# Altium PCB handwriting_PCB1.PcbDoc
Units mil, origin at the board's own origin, x right, y up, seen from the top; angles counter-clockwise.
Board outline 2890 x 3915 mil, 2 copper layers (Top Layer, Bottom Layer); 66 components, 63 nets, 308 pads, 795 vias.
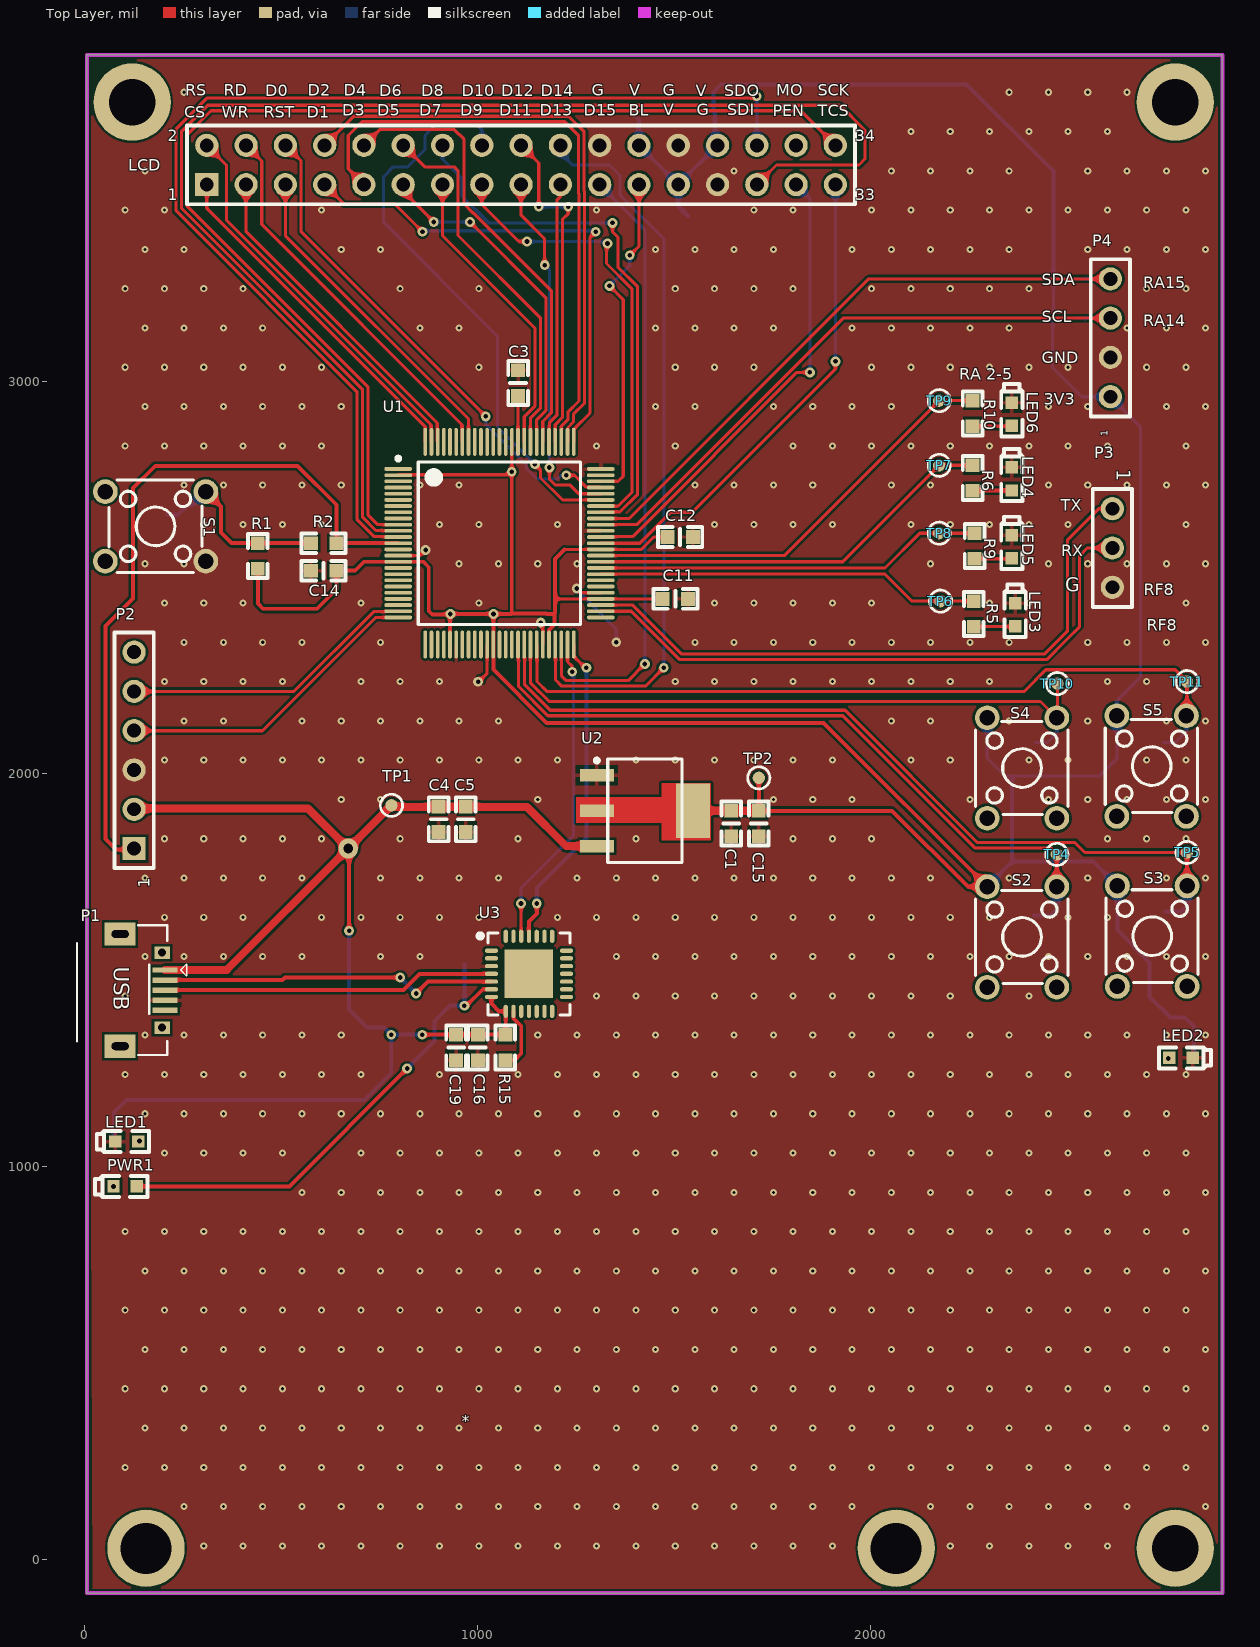
[diagram p0: Top Layer view]
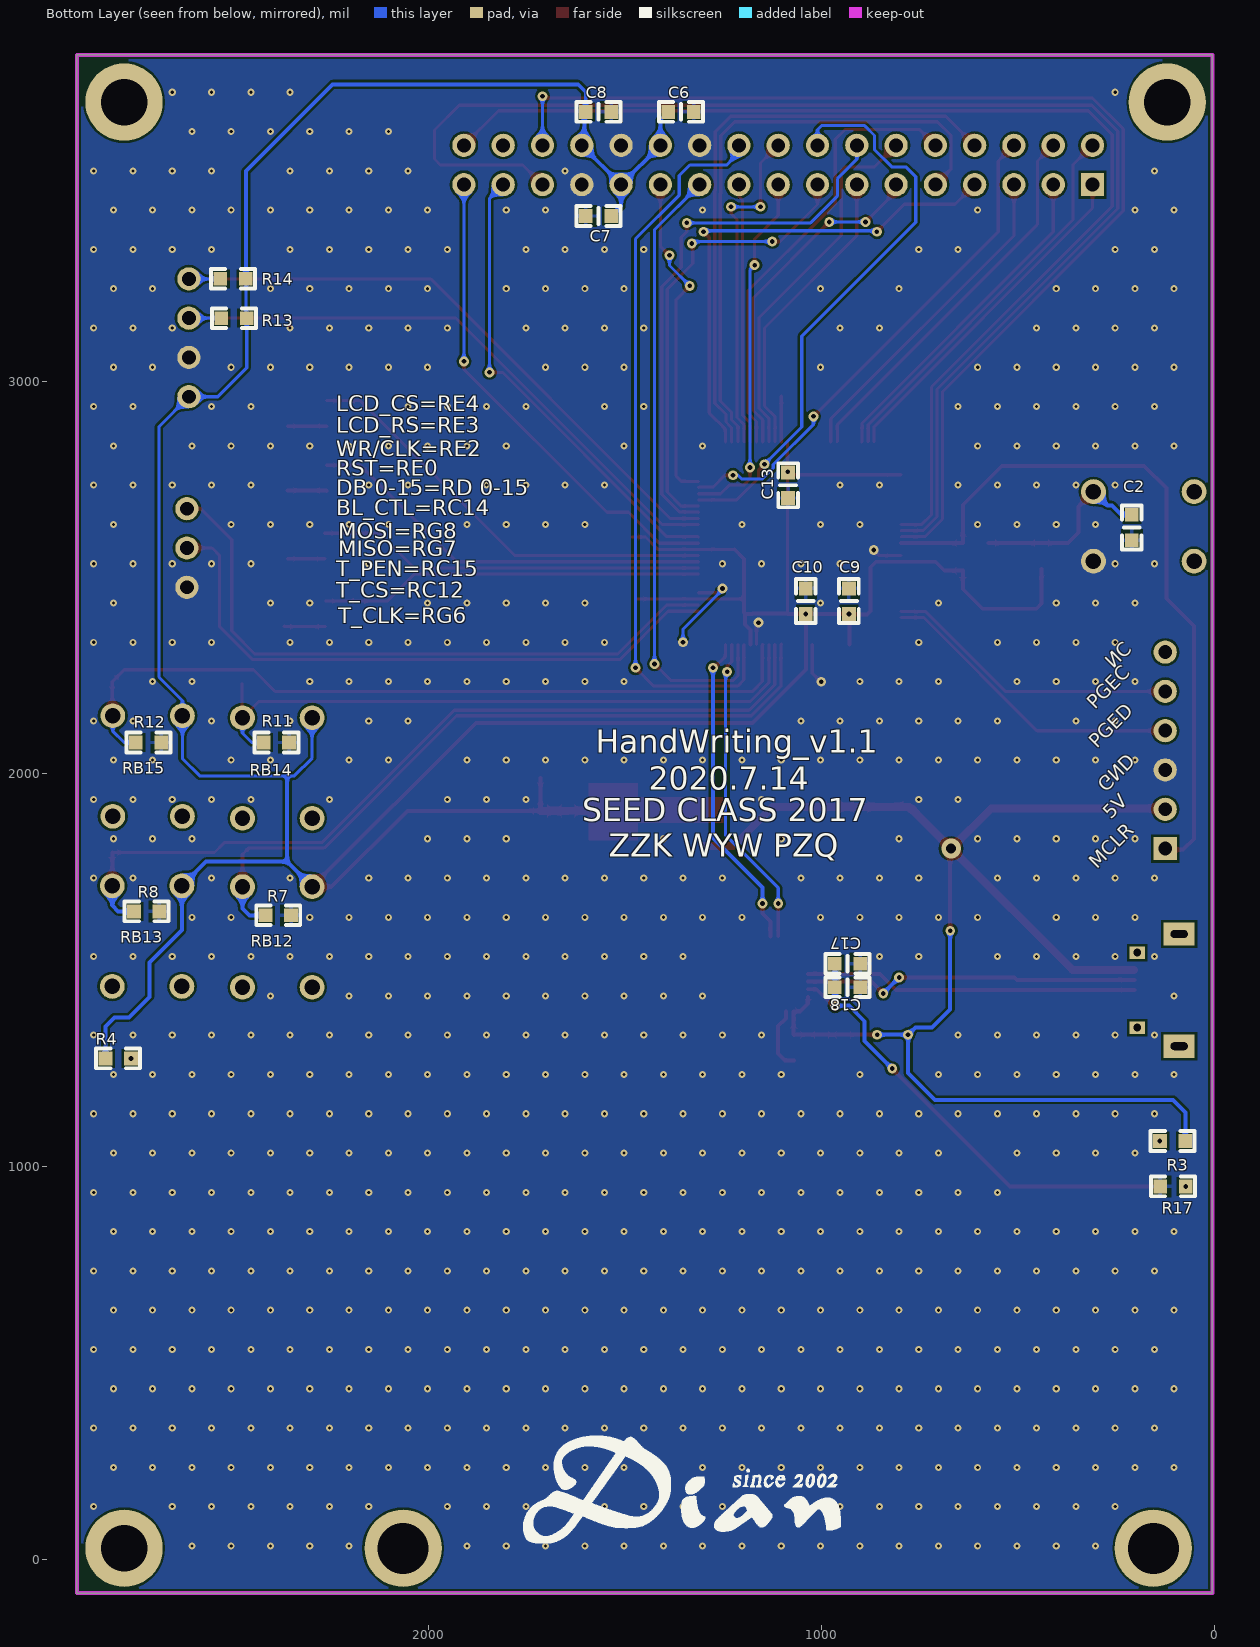
[diagram p1: Bottom Layer view, seen from below]

## Layer stack, top to bottom
Top Solder: solder mask 0.4, Solder Resist, Dk 3.5
Top Layer: signal copper 1.4
Dielectric 1: dielectric 12.6, FR-4, Dk 4.8
Bottom Layer: signal copper 1.4
Bottom Solder: solder mask 0.4, Solder Resist, Dk 3.5

## Board outline
5,-85 2895,-85 2895,3695 2895,3830 5,3830

## Design rules (kind name [scope] priority, off if disabled: settings)
Clearance [All] p1: gap=6 ignorepadtopadclearanceinfootprint=FALSE
HoleSize [All] p1: absolutevalues=TRUE maxlimit=1000 minlimit=1 maxpercent=80.000 minpercent=20.000
MinimumSolderMaskSliver [All] p1: minsoldermaskwidth=0
PlaneConnect GND_1 [InNet('GND')] p1: planeconnectstyle=Direct reliefexpansion=20 reliefentries=4 reliefconductorwidth=10 reliefairgap=10
PlaneConnect [All] p2: planeconnectstyle=Relief reliefexpansion=20 reliefentries=4 reliefconductorwidth=10 reliefairgap=10
PolygonConnect GND [InNet('GND')] p1: thpad.connectstyle=Direct thpad.reliefconductorwidth=10 thpad.reliefentries=4 thpad.polygonreliefangle="90 Angle" thpad.airgapwidth=10 smdpad.connectstyle=Relief smdpad.reliefconductorwidth=10 smdpad.reliefentries=4 smdpad.polygonreliefangle="90 Angle" smdpad.airgapwidth=10 via.connectstyle=Direct via.reliefconductorwidth=10 via.reliefentries=4 via.polygonreliefangle="90 Angle" via.airgapwidth=10
PolygonConnect [All] p2: connectstyle=Relief reliefconductorwidth=10 reliefentries=4 polygonreliefangle="90 Angle" airgapwidth=10
RoutingVias [All] p1: holewidth=12 width=25 viastyle="Through Hole" minholewidth=8 minwidth=18 maxholewidth=50 maxwidth=100
SilkToSilkClearance [All] p1: silktosilkclearance=0
SilkToSolderMaskClearance [IsPad] p1: minsilkscreentomaskgap=0 clearancetoexposedcopper=TRUE
SolderMaskExpansion [All] p1: expansion=4 useseparateexpansions=TRUE expansionbottom=4
Width [All] p1: maxlimit=1000 minlimit=6 preferedwidth=8
25 further rules are at their usual default settings.

## Components (designator, comment, footprint, x,y, rotation, side; value= is the part's Value field where it differs from the comment)
* "Dian_logo" Dian_logo 970,95 r0 top
C1 "1uF" 0603C 1644.66,1906 r270 top value=100pF
C2 "100nF" 0603C 210,2595 r90 bottom value=100pF
C3 "100nF" 0603C 1102.24,2962.19 r90 top value=100pF
C4 "2.2uF" 0603C 900,1852.06 r90 top value=100pF
C5 "100nF" 0603C 969.25,1852.06 r90 top value=100pF
C6 "100nF" 0603C 1325,3685 r0 bottom value=100pF
C7 "100nF" 0603C 1600,3420 r180 bottom value=100pF
C8 "100nF" 0603C 1535,3685 r0 bottom value=100pF
C9 "100nF" 0603C 930,2472.18 r270 bottom value=100pF
C10 "100nF" 0603C 1040,2472.18 r270 bottom value=100pF
C11 "100nF" 0603C 1535,2445.45 r180 top value=100pF
C12 "100nF" 0603C 1547.5,2602.93 r180 top value=100pF
C13 "100nF" 0603C 1085,2702.18 r90 bottom value=100pF
C14 "100nF" 0603C 575,2517.18 r0 top value=100pF
C15 "100nF" 0603C 1715,1841 r90 top value=100pF
C16 "1uF" 0603C 1000,1270.85 r90 top value=100pF
C17 "4.7uF" 0603C 900.88,1516.81 r0 bottom value=100pF
C18 "100nF" 0603C 900.88,1456.81 r0 bottom value=100pF
C19 "100nF" 0603C 944.53,1271.18 r90 top value=100pF
LCD "TFT液晶屏幕" TFT液晶屏 1010,3550 r90 top
LED1 "LED_RED" 0603LED 135.91,1064.25 r180 top
LED2 "LED_RED" 0603LED 2760.15,1277.17 r0 top
LED3 "LED_RED" 0603LED 2367.43,2375.7 r90 top
LED4 "LED_RED" 0603LED 2359.21,2721.42 r90 top
LED5 "LED_RED" 0603LED 2359.21,2548.6 r90 top
LED6 "LED_RED" 0603LED 2359.21,2885.94 r90 top
P1 "USB" MICRO_USB_四脚 89.47,1449.72 r270 top
P2 "PICTIK3" Pictik3 125,1810 r180 top
P3 "USART/UART" "HEADER 3x1 M" 2615,2675 r270 top
P4 "IIC" "HEADER 4x1" 2610,2960 r90 top
PWR1 "LED_RED" 0603led 131.65,950 r180 top
R1 "10K" 0603R 440,2587.18 r270 top value=1K
R2 "1K" 0603R 640,2587.18 r180 top
R3 "10K" 0603R 138.56,1065.67 r180 bottom value=1K
R4 "2k" 0603R 2757.5,1275.75 r0 bottom value=1K
R5 "2k" 0603R 2262.43,2374.76 r90 top value=1K
R6 "2k" 0603R 2259.21,2720.47 r90 top value=1K
R7 "10K" 0603R 2350,1640 r0 bottom value=1K
R8 "10K" 0603R 2685,1650 r0 bottom value=1K
R9 "2k" 0603R 2264.21,2547.66 r90 top value=1K
R10 "2k" 0603R 2259.21,2885 r90 top value=1K
R11 "10K" 0603R 2355,2080 r0 bottom value=1K
R12 "10K" 0603R 2680,2080 r0 bottom value=1K
R13 "10K" 0603R 2462.83,3160 r0 bottom value=1K
R14 "10K" 0603R 2465,3260 r0 bottom value=1K
R15 "4.7k" 0603R 1070,1270.85 r90 top value=1K
R17 "680" 0603R 137.59,950 r180 bottom value=1K
S1 "PushButton_4p" SW-6x6mm 179.64,2630 r270 top
S2 "PushButton_4p" SW-6x6mm 2385,1585 r0 top
S3 "PushButton_4p" SW-6x6mm 2716.42,1587.05 r0 top
S4 "PushButton_4p" SW-6x6mm 2385,2015 r0 top
S5 "PushButton_4p" SW-6x6mm 2715,2020 r0 top
TP1 "5V" TP_SMT 780,1920 r0 top
TP2 "3V3" TP_SMT 1715,1990 r90 top
TP4 "KEY1" TP_SMT 2473.58,1795 r90 top
TP5 "KEY2" TP_SMT 2805,1800 r90 top
TP6 "IO1" TP_SMT 2177.43,2439.76 r90 top
TP7 "IO3" TP_SMT 2174.21,2785.47 r90 top
TP8 "IO2" TP_SMT 2174.21,2612.66 r90 top
TP9 "IO4" TP_SMT 2174.21,2950 r90 top
TP10 "KEY3" TP_SMT 2475,2230 r90 top
TP11 "KEY4" TP_SMT 2805,2235 r90 top
U1 "PIC32MX575F512L-80I/PT" TQFP-PT100_N 1055,2587.18 r0 top
U2 "AMS1117" SOT223_4 1425,1906.34 r0 top
U3 "CP2102" QFN-28_5x5x05P 1130,1491.18 r270 top

## Footprints (in the part's own frame and the unit in brackets; to place one, negate y for a bottom-side part, rotate by r counter-clockwise, add the part's x,y. Pads: shape width x height; smd on the part's side, far side on the other; paste and mask are expansions set on the pad)
0603C [mil] "电容 0603封装"
  rect 35x35 smd: 1(0,0) 2(65,0)
  silkscreen extent -24,-25 88,25, body extent 1,-16 64,15, height 18
0603LED [mm] "LED 0603封装"
  rect 0.8x0.8 smd: 1(0,0) 2(1.5,0)
  silkscreen extent -0.69,-0.69 2.69,0.69
0603led [mm]
  rect 0.8x0.8 smd: 1(0,0) 2(1.5,0)
  silkscreen extent -0.69,-0.69 2.69,0.69
0603R [mil] "电阻 0603封装"
  rect 35x35 smd: 1(0,0) 2(65,0)
  silkscreen extent -24,-25 88,25, body extent 1,-16 64,16, height 16
Dian_logo [mil]
"HEADER 3x1 M" [mm] "2.54mm排母"
  round 1.5 hole 0.9: 1(0,0) 2(2.54,0) 3(5.08,0)
  silkscreen extent -1.27,-1.27 6.35,1.27, body extent -1.27,-1.27 6.35,1.27, height 6.02
"HEADER 4x1" [mm] "2.54mm 排针"
  round 1.5 hole 0.9: 1(0,0) 2(2.54,0) 3(5.08,0) 4(7.62,0)
  silkscreen extent -1.27,-1.27 8.89,1.27, body extent -1.27,-1.27 8.89,1.27, height 6.39
MICRO_USB_四脚 [mm] "micro型USB ，5.7*7.8*2.5mm"
  rect 0.35x1.6 smd: 1(-1.3,2.9) 2(-0.65,2.9) 3(0,2.9) 4(0.65,2.9) 5(1.3,2.9)
  rect 1.5x2 hole 0.5 slot 1.1 at 90 deg: 5(-3.625,0) 5(3.625,0)
  rect 0.8x1 hole 0.5: 5(-2.425,2.71) 5(2.425,2.71)
  silkscreen extent -4.19,-2.79 4.19,4.3, body extent -4,-2.71 4,2.89, height 2.8
Pictik3 [mm]
  rect 1.5x1.5 hole 0.9: 1(0,0)
  round 1.5 hole 0.9: 2(0,-2.54) 3(0,-5.08) 4(0,-7.62) 5(0,-10.16) 6(0,-12.7)
  silkscreen extent -1.27,-13.97 1.27,1.27
QFN-28_5x5x05P [mm]
  rect 3.13x3.13 smd mask+0.051: 0(0,0)
  oval 0.28x0.85 smd mask+0.051: 1(-1.5,-2.425) 2(-1,-2.425) 3(-0.5,-2.425) 4(0,-2.425) 5(0.5,-2.425) 6(1,-2.425) 7(1.5,-2.425) 15(1.5,2.425) 16(1,2.425) 17(0.5,2.425) 18(0,2.425) 19(-0.5,2.425) 20(-1,2.425) 21(-1.5,2.425)
  oval 0.85x0.28 smd mask+0.051: 8(2.425,-1.5) 9(2.425,-1) 10(2.425,-0.5) 11(2.425,0) 12(2.425,0.5) 13(2.425,1) 14(2.425,1.5) 22(-2.425,1.5) 23(-2.425,1) 24(-2.425,0.5) 25(-2.425,0) 26(-2.425,-0.5) 27(-2.425,-1) 28(-2.425,-1.5)
  silkscreen extent -2.65,-3.3 2.65,2.65
SOT223_4 [mm] "SOT223, 4-Leads, Body 6.50x7.00mm (avg), Pitch 2.29mm, IPC Medium Density"
  rect 2.2x0.8 smd: 1(-3.1,2.29) 2(-3.1,0) 3(-3.1,-2.29)
  rect 2.2x3.5 smd: 4(3.1,0)
  silkscreen extent -3.22,-3.35 2.4,3.36, body extent -1.86,-3.35 1.86,3.35, height 1.8
SW-6x6mm [mm] "四脚按键6x6mm"
  round 1.6 hole 1: 1(2.25,3.25) 2(-2.25,3.25) 3(-2.25,-3.25) 4(2.25,-3.25)
  silkscreen extent -3,-3 2.97,3
TFT液晶屏 [mm]
  rect 1.5x1.5 hole 0.9: 1(-1.27,17.78)
  round 1.5 hole 0.9: 2(1.27,17.78) 3(-1.27,15.24) 4(1.27,15.24) 5(-1.27,12.7) 6(1.27,12.7) 7(-1.27,10.16) 8(1.27,10.16) 9(-1.27,7.62) 10(1.27,7.62) 11(-1.27,5.08) 12(1.27,5.08) 13(-1.27,2.54) 14(1.27,2.54) 15(-1.27,0) 16(1.27,0) 17(-1.27,-2.54) 18(1.27,-2.54) 19(-1.27,-5.08) 20(1.27,-5.08) 21(-1.27,-7.62) 22(1.27,-7.62) 23(-1.27,-10.16) 24(1.27,-10.16) 25(-1.27,-12.7) 26(1.27,-12.7) 27(-1.27,-15.24) 28(1.27,-15.24) 29(-1.27,-17.78) 30(1.27,-17.78) 31(-1.27,-20.32) 32(1.27,-20.32) 33(-1.27,-22.86) 34(1.27,-22.86)
  silkscreen extent -2.54,-24.13 2.54,19.05
TP_SMT [mm]
  round 0.8 smd: 1(0,0)
  silkscreen extent -0.72,-0.72 0.72,0.72
TQFP-PT100_N [mm] "Thin QFP, 100-Leads, Body 12x12mm, Pitch 0.4mm, IPC Medium Density"
  oval 1.8x0.24 smd: 1(-6.55,4.8) 2(-6.55,4.4) 3(-6.55,4) 4(-6.55,3.6) 5(-6.55,3.2) 6(-6.55,2.8) 7(-6.55,2.4) 8(-6.55,2) 9(-6.55,1.6) 10(-6.55,1.2) 11(-6.55,0.8) 12(-6.55,0.4) 13(-6.55,0) 14(-6.55,-0.4) 15(-6.55,-0.8) 16(-6.55,-1.2) 17(-6.55,-1.6) 18(-6.55,-2) 19(-6.55,-2.4) 20(-6.55,-2.8) 21(-6.55,-3.2) 22(-6.55,-3.6) 23(-6.55,-4) 24(-6.55,-4.4) 25(-6.55,-4.8) 51(6.55,-4.8) 52(6.55,-4.4) 53(6.55,-4) 54(6.55,-3.6) 55(6.55,-3.2) 56(6.55,-2.8) 57(6.55,-2.4) 58(6.55,-2) 59(6.55,-1.6) 60(6.55,-1.2) 61(6.55,-0.8) 62(6.55,-0.4) 63(6.55,0) 64(6.55,0.4) 65(6.55,0.8) 66(6.55,1.2) 67(6.55,1.6) 68(6.55,2) 69(6.55,2.4) 70(6.55,2.8) 71(6.55,3.2) 72(6.55,3.6) 73(6.55,4) 74(6.55,4.4) 75(6.55,4.8)
  oval 0.24x1.8 smd: 26(-4.8,-6.55) 27(-4.4,-6.55) 28(-4,-6.55) 29(-3.6,-6.55) 30(-3.2,-6.55) 31(-2.8,-6.55) 32(-2.4,-6.55) 33(-2,-6.55) 34(-1.6,-6.55) 35(-1.2,-6.55) 36(-0.8,-6.55) 37(-0.4,-6.55) 38(0,-6.55) 39(0.4,-6.55) 40(0.8,-6.55) 41(1.2,-6.55) 42(1.6,-6.55) 43(2,-6.55) 44(2.4,-6.55) 45(2.8,-6.55) 46(3.2,-6.55) 47(3.6,-6.55) 48(4,-6.55) 49(4.4,-6.55) 50(4.8,-6.55) 76(4.8,6.55) 77(4.4,6.55) 78(4,6.55) 79(3.6,6.55) 80(3.2,6.55) 81(2.8,6.55) 82(2.4,6.55) 83(2,6.55) 84(1.6,6.55) 85(1.2,6.55) 86(0.8,6.55) 87(0.4,6.55) 88(0,6.55) 89(-0.4,6.55) 90(-0.8,6.55) 91(-1.2,6.55) 92(-1.6,6.55) 93(-2,6.55) 94(-2.4,6.55) 95(-2.8,6.55) 96(-3.2,6.55) 97(-3.6,6.55) 98(-4,6.55) 99(-4.4,6.55) 100(-4.8,6.55)
  silkscreen extent -6.67,-5.25 5.25,5.59, body extent -6,-6 6,6, height 1.2

## Part data
C1 C2 C3 C4 C5 C6 C7 C8 C9 C10 C11 C12 C13 C14 C15 C16 C17 C18 C19: library part Cap, "Capacitor", LatestRevisionDate=17-Jul-2002, LatestRevisionNote="Re-released for DXP Platform.", PackageDescription="Radial Cap, Thru-Hole; 2 Leads; 0.3 in Pin Spacing", PackageReference=RAD-0.3, Published=8-Jun-2000, Publisher="Altium Limited"
LCD: "原子外部接口"
LED1 LED2 LED3 LED4 LED5 LED6 PWR1: library part LED, "Typical RED, GREEN, YELLOW, AMBER GaAs LED", LatestRevisionDate=17-Jul-2002, LatestRevisionNote="Re-released for DXP Platform.", PackageDescription="SM LED; 2 Flat Leads", PackageReference=3.2X1.6X1.1, PackageVersion=Feb-2002, Published=8-Jun-2000, Publisher="Altium Limited"
P2: library part pictik3
P3: library part UART_3pin
R1 R2 R3 R4 R5 R6 R7 R8 R9 R10 R11 R12 R13 R14 R15 R17: library part Res1, "Resistor", LatestRevisionDate=17-Jul-2002, LatestRevisionNote="Re-released for DXP Platform.", PackageDescription="Axial Device, Thru-Hole; 2 Leads; 0.3 in Pin Spacing", PackageReference=AXIAL-0.3, Published=8-Jun-2000, Publisher="Altium Limited"
TP1 TP2 TP4 TP5 TP6 TP7 TP8 TP9 TP10 TP11: library part TP, "Test Point"
U1: "High Performance 80 MHz MIPS-Based 32-Bit Flash Microcontroller with USB and CAN, 512KB Program Memory, 100-pin TQFP, Industrial Temperature", Supplier Part Number 1=PIC32MX575F512L-80I/PT-ND, ComponentLink1Description=Datasheet, ComponentLink1URL=http://ww1.microchip.com/downloads/en/DeviceDoc/DS-61156B.pdf, ComponentLink2Description="Packaging Specification", ComponentLink2URL=http://ww1.microchip.com/downloads/en/PackagingSpec/en012702.pdf, ComponentLink3Description="Microchip.com Home", ComponentLink3URL=http://www.microchip.com/, DatasheetVersion="revB, Nov-2009", PackageDescription="100-Lead Plastic Thin Quad Flatpack (PT) - 12x12x1mm Body, 2.00mm [TQFP]", PackageReference=TQFP-PT100, PackageVersion="revBB, Aug-2009", Published=2-Dec-2009, Publisher="Altium Limited", Supplier 1=Digi-Key, Supplier 2=Farnell, Supplier Part Number 2=1778962

## Free pads (board coordinates)
  round 196.85 hole 129.92: 1(155.28,28.74) 2(2064.72,28.74)
  round 196.85 hole 118.11: 3(2775,28.74) 4(2775,3710) 5(120,3710)

## Via types
v1: diameter 18, hole 8, Top Layer to Bottom Layer, tented both sides, 751 vias
v2: diameter 25, hole 12, Top Layer to Bottom Layer, tented both sides, 42 vias
v3: diameter 25/25 (per signal layer), hole 12, Top Layer to Bottom Layer, tented both sides, 1 vias
v4: diameter 50, hole 25, Top Layer to Bottom Layer, tented both sides, 1 vias

## Nets (pads, with @x,y where several pads share a name; then routed paths per layer and width w, separated by ;. In a path a pad name is that pad's centre, name@x,y a point inside that pad or via, vN(x,y) a via of type N, cw(c..) or ccw(c..) an arc to the next point about the centre after c; other vN are vias at no path point)
3V3: C1.1 C6.2 C7.2 C8.2 C9.2 C10.2 C11.2 C12.2 C13.2 C14.2 C15.2 LCD.24 LCD.25 LCD.28 P4.1 R1.2 R4.2 R13.1 R14.1 S2.2 S3.2 S4.2 S5.2 TP2.1 U1.2 U1.16 U1.30 U1.37 U1.46 U1.54 U1.62 U1.86 U2.2 U2.4 | length 10283.2
  Top Layer w8: U1.2 798.15,2761.44 1078.62,2761.44 v2(1086.08,2768.9) ; 1085,2407.18 1086.08,2408.27 v2(1086.08,2768.9) ; U1.86 1086.5,2769.31 v2(1086.08,2768.9) ; 1196.73,2445.45 U1.54 C11.2 ; 1220.75,2571.44 U1.62 1416.44,2571.44 1447.93,2602.93 C12.2
  Top Layer w10: R1.2 440,2433.58 453.13,2420.45 590.45,2420.45 640,2470 C14.2 687.18,2517.18 709.94,2539.94 U1.16 861.08,2539.94 875,2526.02 875,2415 883.8,2406.2 v2@929.02,2406.2 ; U1.30 v2@929.02,2406.2 ; v2(1040,2407.18) 1085,2407.18 ; 1086.08,2408.27 1086.32,2408.5 1174.73,2408.5 1176.05,2407.18 1192.66,2407.18 ; U1.46 1180.98,2366.51 1195,2380.53 1195,2407.18 1192.66,2407.18 ; 1220.75,2571.44 1196.73,2547.42 1196.73,2445.45 1196.73,2411.25 1192.66,2407.18 ; U2.4@1545,1908.39 U2.4 ; TP2.1 C15.2 2054,1906 2247.05,1712.95 S2.2 1879.37,2130 1175,2130 1039.25,2265.75 U1.37 1039.25,2406.44 1038.5,2407.18 v2(930,2407.18) v2@929.02,2406.2
  Top Layer w20: U2.2 U2.4 1644.66,1906.34 C1.1@1645,1906 ; C1.1 C1.1@1645,1906 ; C15.2 C1.1@1645,1906
  Bottom Layer w8: S4.2 2296.42,2040.08 2341.5,1995 2360,1995 2582.83,1995 2626.42,2038.58 S5.2 2626.42,2186.42 2686.22,2246.22 2686.22,2883.78 P4.1 2536.73,2960 2462.83,3033.9 R13.1 2465,3162.17 R14.1
  Bottom Layer w10: C6.2 1410,3665 LCD.24 LCD.25 ; C7.2 1510,3445 LCD.25 ; C8.2 1600,3736.01 1618.99,3755 2244.07,3755 2465,3534.07 R14.1 ; C8.2@1603.29,3680 1603.29,3606.71 LCD.28 LCD.25 ; S2.2 2360,1776.54 ; 2360,1995 2360,1776.54 ; R4.2 2822.5,1356.71 2799.21,1380 2762.5,1380 2710,1432.5 2710,1520.32 2627.83,1602.49 S3.2 2566.3,1776.54 2360,1776.54
5V: C4.2 C5.2 C16.2 C19.2 P1.1 P2.2 R3.2 R15.2 TP1.1 U2.3 U3.7 U3.8 | length 3773.9
  Top Layer w10: v4(670,1810) 672.32,1807.68 v2(672.32,1600.93) ; v2(858.21,1336.18) C19.2 1069.67,1336.18 R15.2 1070.94,1336.8 U3.8 1054.29,1395.71 1034.53,1415.47 U3.7
  Top Layer w20: P2.2@125,1912.2 567.8,1912.2 v4(670,1810) ; P1.1@203.65,1501.18 361.18,1501.18 v4(670,1810) ; U2.3 1224.82,1816.18 1125,1916 776,1916 v4(670,1810)
  Bottom Layer w10: R3.2 73.56,1138.34 105.22,1170 711.13,1170 779.42,1238.29 v2(779.42,1336.18) ; v2(672.32,1600.93) 672.32,1400.76 718.08,1355 760.61,1355 v2(779.42,1336.18) ; v2(858.21,1336.18) v2(779.42,1336.18)
D+: P1.3 U3.4 | length 849
  Top Layer w10: P1.3@202.6,1450 810.32,1450 851.5,1491.18 U3.4
D-: P1.2 U3.5 | length 863.8
  Top Layer w10: P1.2@202.6,1475.59 502.78,1475.59 509,1481.81 v2(802.32,1481.81) ; v2(842.81,1441.32) 872.99,1471.5 U3.5
  Bottom Layer w10: v2(802.32,1481.81) v2(842.81,1441.32)
DB0: LCD.6 U1.72 | length 1298.9
  Top Layer w8: LCD.6 550,3560 550,3380 v2(1020,2910) ; v2(1225,2760) 1246.01,2760 1276.07,2729.94 1311.85,2729.94 U1.72
  Bottom Layer w8: LCD.6@510,3595 LCD.6 ; v2(1020,2910) 1020,2890.16 1122.5,2787.66 1122.5,2778.65 1150.68,2750.47 1202.79,2750.47 1212.32,2760 v2(1225,2760)
DB1: LCD.7 U1.76 | length 1299.9
  Top Layer w8: LCD.7 660,3450 789,3450 v2(859,3380) ; U1.76 1243.98,2876.79 1285.5,2918.32 1285.5,3365.5 v2(1300,3380)
  Bottom Layer w8: v2(859,3380) 861.5,3382.5 1297.5,3382.5 v2(1300,3380)
DB2: LCD.8 U1.77 | length 1515.2
  Top Layer w8: LCD.8 684,3674 1230.8,3674 1270.47,3634.33 1270.47,3483.63 1271.5,3482.6 1271.5,2943.47 1243,2914.97 1243,2895.61 1229.25,2881.87 1229.25,2846.08 U1.77
DB3: LCD.9 U1.78 | length 1555.6
  Top Layer w8: LCD.9 670,3540 670,3625 705,3660 1220.7,3660 1256.47,3624.23 1256.47,3477.83 1257.5,3476.8 1257.5,2949.27 1229,2920.77 1229,2901.41 1212.48,2884.89 U1.78
DB4: LCD.10 U1.81 | length 1153.6
  Top Layer w8: LCD.10 750,3640 940,3640 965,3615 965,3450.59 988.09,3427.5 989.32,3427.5 1187,3229.82 1187,2918.81 1165.24,2897.05 U1.81
DB5: LCD.11 U1.82 | length 869.1
  Top Layer w8: LCD.11 810,3482.68 v2(887.68,3405) ; v2(980,3405) 1173,3212 1173,2924.61 1149.49,2901.1 U1.82
  Bottom Layer w8: v2(887.68,3405) v2(980,3405)
DB6: LCD.12 U1.83 | length 953.9
  Top Layer w8: LCD.12 865,3545 940,3545 949.53,3535.47 949.53,3370.47 1159,3161 1159,2930.41 1133.74,2905.15 U1.83
DB7: LCD.13 U1.84 | length 763.6
  Top Layer w8: LCD.13 910.18,3499.82 910.18,3395.68 910,3395.5 910,3370 1145,3135 1145,2936.21 1117.99,2909.2 U1.84
DB8: LCD.14 U1.68 | length 1391.2
  Top Layer w8: U1.68 1313.9,2666.95 1361.75,2666.95 1406.5,2711.7 1406.5,3239.8 1356.67,3289.63 1356.67,3365.7 1342.77,3379.6 v2(1342.77,3402.5)
  Bottom Layer w8: LCD.14 910,3564.02 959.49,3514.53 959.49,3470.51 1027.5,3402.5 v2(1342.77,3402.5)
DB9: LCD.15 U1.69 | length 1166.7
  Top Layer w8: LCD.15 1010,3449.41 1104.41,3355 v2(1125,3355) ; U1.69 1356.67,2681.67 1392.5,2717.5 1392.5,3234 1327.5,3299 1327.5,3347.5 v2(1330,3350)
  Bottom Layer w8: v2(1125,3355) 1325,3355 v2(1330,3350)
DB10: LCD.16 U1.70 | length 1478.1
  Top Layer w8: v2(1145,2787.97) 1159.51,2773.46 1159.51,2753.17 1215.26,2697.42 U1.70
  Bottom Layer w8: LCD.16 1010,3640 1000,3650 890,3650 865,3625 865,3588.5 821.5,3545 785,3545 760,3520 760,3403.87 1050,3113.87 1050,2882.97 v2(1145,2787.97)
DB11: LCD.17 U1.71 | length 943.3
  Top Layer w8: LCD.17@1122.5,3487.5 LCD.17 1110,3421.51 1170,3361.51 v2(1170,3295) ; v2(1182.01,2780) 1182.01,2750.47 1197.48,2735 1235,2735 1256.83,2713.17 U1.71
  Bottom Layer w8: v2(1170,3295) 1182.01,3282.99 v2(1182.01,2780)
DB12: LCD.18 U1.79 | length 869.4
  Top Layer w8: LCD.18 1155,3555 v2(1155,3443.38) ; U1.79 1196.73,2888.94 1215,2907.21 1215,3411 1230,3426 v2(1230,3443.38) v2@1235,3438.38
  Bottom Layer w8: v2(1155,3443.38) v2(1230,3443.38)
DB13: LCD.19 U1.80 | length 679.7
  Top Layer w8: U1.80 1182.01,2846.08 1182.01,2894.02 1201,2913.01 1201,3460 1210,3469 LCD.19 LCD.19@1201,3491
DB14: LCD.20 U1.47 | length 1886.2
  Top Layer w8: U1.47 1197.76,2328.29 1197.76,2238.98 1213.23,2223.5 1426.79,2223.5 v2(1473.29,2270)
  Bottom Layer w8: LCD.20 1210,3580.8 1240.8,3550 1335,3550 1361.75,3523.25 1361.75,3473.25 1473.29,3361.71 v2(1473.29,2270)
DB15: LCD.21 U1.48 | length 1582.1
  Top Layer w8: U1.48 1212.48,2250.25 1225.23,2237.5 1382.5,2237.5 v2(1425,2280)
  Bottom Layer w8: LCD.21 1425,3385 v2(1425,2280)
GND: C1.2 C2.1 C3.2 C4.1 C5.1 C6.1 C7.1 C8.1 C9.1 C10.1 C11.1 C12.1 C13.1 C14.1 C15.1 C16.1 C17.1 C18.1 C19.1 LCD.22 LCD.26 LCD.27 LED1.2 LED2.2 LED3.2 LED4.2 LED5.2 LED6.2 P1.4 P2.3 P3.3 P4.2 R7.1 R8.1 R11.1 R12.1 R17.1 S1.1 U1.15 U1.31 U1.36 U1.45 U1.55 U1.65 U1.75 U2.1 U3.3 | length 483.5
  Top Layer w8: U1.15 852.76,2555.69 v2(867.07,2570) ; v2@1002.32,2235 1023.5,2256.18 U1.36 ; v2(1160,2385) 1160.49,2385 1165.24,2380.26 U1.45 ; v2(1251.71,2472.18) 1251.71,2469.08 1259.59,2461.2 U1.55
  Bottom Layer w8: v2(1251.71,2472.18) 1251.71,2469.08 1352.32,2368.47 v2(1352.32,2335)
  other v1: 302.32,35 402.32,35 502.32,35 602.32,35 702.32,35 802.32,35 902.32,35 1002.32,35 1102.32,35 1202.32,35 1302.32,35 1402.32,35 1502.32,35 1602.32,35 1702.32,35 1802.32,35 1902.32,35 2202.32,35 2302.32,35 2402.32,35 2502.32,35 2602.32,35 252.32,135 352.32,135 452.32,135 552.32,135 652.32,135 752.32,135 852.32,135 952.32,135 1052.32,135 1152.32,135 1252.32,135 1352.32,135 1452.32,135 1552.32,135 1652.32,135 1752.32,135 1852.32,135 1952.32,135 2152.32,135 2252.32,135 2352.32,135 2452.32,135 2552.32,135 2652.32,135 2852.32,135 102.32,235 202.32,235 302.32,235 402.32,235 502.32,235 602.32,235 702.32,235 802.32,235 902.32,235 1002.32,235 1102.32,235 1202.32,235 1302.32,235 1402.32,235 1502.32,235 1602.32,235 1702.32,235 1802.32,235 1902.32,235 2002.32,235 2102.32,235 2202.32,235 2302.32,235 2402.32,235 2502.32,235 2602.32,235 2702.32,235 2802.32,235 152.32,335 252.32,335 352.32,335 452.32,335 552.32,335 652.32,335 752.32,335 852.32,335 952.32,335 1052.32,335 1152.32,335 1252.32,335 1352.32,335 1452.32,335 1552.32,335 1652.32,335 1752.32,335 1852.32,335 1952.32,335 2052.32,335 2152.32,335 2252.32,335 2352.32,335 2452.32,335 2552.32,335 2652.32,335 2752.32,335 2852.32,335 102.32,435 202.32,435 302.32,435 402.32,435 502.32,435 602.32,435 702.32,435 802.32,435 902.32,435 1002.32,435 1102.32,435 1202.32,435 1302.32,435 1402.32,435 1502.32,435 1602.32,435 1702.32,435 1802.32,435 1902.32,435 2002.32,435 2102.32,435 2202.32,435 2302.32,435 2402.32,435 2502.32,435 2602.32,435 2702.32,435 2802.32,435 152.32,535 252.32,535 352.32,535 452.32,535 552.32,535 652.32,535 752.32,535 852.32,535 952.32,535 1052.32,535 1152.32,535 1252.32,535 1352.32,535 1452.32,535 1552.32,535 1652.32,535 1752.32,535 1852.32,535 1952.32,535 2052.32,535 2152.32,535 2252.32,535 2352.32,535 2452.32,535 2552.32,535 2652.32,535 2752.32,535 2852.32,535 102.32,635 202.32,635 302.32,635 402.32,635 502.32,635 602.32,635 702.32,635 802.32,635 902.32,635 1002.32,635 1102.32,635 1202.32,635 1302.32,635 1402.32,635 1502.32,635 1602.32,635 1702.32,635 1802.32,635 1902.32,635 2002.32,635 2102.32,635 2202.32,635 2302.32,635 2402.32,635 2502.32,635 2602.32,635 2702.32,635 2802.32,635 152.32,735 252.32,735 352.32,735 452.32,735 552.32,735 652.32,735 752.32,735 852.32,735 952.32,735 1052.32,735 1152.32,735 1252.32,735 1352.32,735 1452.32,735 1552.32,735 1652.32,735 1752.32,735 1852.32,735 1952.32,735 2052.32,735 2152.32,735 2252.32,735 2352.32,735 2452.32,735 2552.32,735 2652.32,735 2752.32,735 2852.32,735 102.32,835 202.32,835 302.32,835 402.32,835 502.32,835 602.32,835 702.32,835 802.32,835 902.32,835 1002.32,835 1102.32,835 1202.32,835 1302.32,835 1402.32,835 1502.32,835 1602.32,835 1702.32,835 1802.32,835 1902.32,835 2002.32,835 2102.32,835 2202.32,835 2302.32,835 2402.32,835 2502.32,835 2602.32,835 2702.32,835 2802.32,835 552.32,935 652.32,935 752.32,935 852.32,935 952.32,935 1052.32,935 1152.32,935 1252.32,935 1352.32,935 1452.32,935 1552.32,935 1652.32,935 1752.32,935 1852.32,935 1952.32,935 2052.32,935 2152.32,935 2252.32,935 2352.32,935 2452.32,935 2552.32,935 2652.32,935 2752.32,935 2852.32,935 202.32,1035 302.32,1035 402.32,1035 502.32,1035 702.32,1035 802.32,1035 902.32,1035 1002.32,1035 1102.32,1035 1202.32,1035 1302.32,1035 1402.32,1035 1502.32,1035 1602.32,1035 1702.32,1035 1802.32,1035 1902.32,1035 2002.32,1035 2102.32,1035 2202.32,1035 2302.32,1035 2402.32,1035 2502.32,1035 2602.32,1035 2702.32,1035 2802.32,1035 152.32,1135 252.32,1135 352.32,1135 452.32,1135 552.32,1135 652.32,1135 752.32,1135 852.32,1135 952.32,1135 1052.32,1135 1152.32,1135 1252.32,1135 1352.32,1135 1452.32,1135 1552.32,1135 1652.32,1135 1752.32,1135 1852.32,1135 1952.32,1135 2052.32,1135 2152.32,1135 2252.32,1135 2352.32,1135 2452.32,1135 2552.32,1135 2652.32,1135 2752.32,1135 2852.32,1135 102.32,1235 202.32,1235 302.32,1235 402.32,1235 502.32,1235 602.32,1235 702.32,1235 902.32,1235 1102.32,1235 1202.32,1235 1302.32,1235 1402.32,1235 1502.32,1235 1602.32,1235 1702.32,1235 1802.32,1235 1902.32,1235 2002.32,1235 2102.32,1235 2202.32,1235 2302.32,1235 2402.32,1235 2502.32,1235 2602.32,1235 2702.32,1235 2802.32,1235 152.32,1335 252.32,1335 352.32,1335 452.32,1335 552.32,1335 652.32,1335 1152.32,1335 1252.32,1335 1352.32,1335 1452.32,1335 1552.32,1335 1652.32,1335 1752.32,1335 1852.32,1335 1952.32,1335 2052.32,1335 2152.32,1335 2252.32,1335 2352.32,1335 2452.32,1335 2552.32,1335 2652.32,1335 2752.32,1335 2852.32,1335 102.32,1435 1302.32,1435 1402.32,1435 1502.32,1435 1602.32,1435 1702.32,1435 1802.32,1435 1902.32,1435 2002.32,1435 2102.32,1435 2202.32,1435 2402.32,1435 152.32,1535 252.32,1535 352.32,1535 452.32,1535 552.32,1535 752.32,1535 852.32,1535 1352.32,1535 1452.32,1535 1552.32,1535 1652.32,1535 1752.32,1535 1852.32,1535 1952.32,1535 2052.32,1535 2152.32,1535 2252.32,1535 2352.32,1535 2452.32,1535 2552.32,1535 2652.32,1535 2752.32,1535 2852.32,1535 202.32,1635 302.32,1635 402.32,1635 602.32,1635 702.32,1635 802.32,1635 902.32,1635 1002.32,1635 1202.32,1635 1302.32,1635 1402.32,1635 1502.32,1635 1602.32,1635 1702.32,1635 1802.32,1635 1902.32,1635 2002.32,1635 2102.32,1635 2202.32,1635 2302.32,1635 2502.32,1635 2602.32,1635 152.32,1735 252.32,1735 352.32,1735 452.32,1735 552.32,1735 752.32,1735 852.32,1735 952.32,1735 1052.32,1735 1252.32,1735 1352.32,1735 1452.32,1735 1552.32,1735 1652.32,1735 1752.32,1735 1852.32,1735 1952.32,1735 2052.32,1735 2152.32,1735 2352.32,1735 2552.32,1735 2752.32,1735 2852.32,1735 202.32,1835 302.32,1835 402.32,1835 502.32,1835 602.32,1835 802.32,1835 1102.32,1835 1402.32,1835 1802.32,1835 1902.32,1835 2002.32,1835 2602.32,1835 2702.32,1835 2802.32,1835 652.32,1935 752.32,1935 1152.32,1935 1752.32,1935 1852.32,1935 1952.32,1935 2252.32,1935 2452.32,1935 2552.32,1935 2652.32,1935 2752.32,1935 2852.32,1935 202.32,2035 302.32,2035 402.32,2035 502.32,2035 602.32,2035 702.32,2035 802.32,2035 902.32,2035 1002.32,2035 1102.32,2035 1202.32,2035 1302.32,2035 1402.32,2035 1502.32,2035 1602.32,2035 1702.32,2035 1802.32,2035 1902.32,2035 2102.32,2035 2202.32,2035 2402.32,2035 2502.32,2035 2702.32,2035 2802.32,2035 252.32,2135 352.32,2135 552.32,2135 652.32,2135 752.32,2135 852.32,2135 952.32,2135 1052.32,2135 2052.32,2135 2152.32,2135 2352.32,2135 2552.32,2135 2752.32,2135 2852.32,2135 202.32,2235 302.32,2235 402.32,2235 502.32,2235 702.32,2235 802.32,2235 902.32,2235 1502.32,2235 1602.32,2235 1702.32,2235 1802.32,2235 1902.32,2235 2002.32,2235 2102.32,2235 2202.32,2235 2302.32,2235 2602.32,2235 2702.32,2235 252.32,2335 352.32,2335 452.32,2335 552.32,2335 752.32,2335 1552.32,2335 1652.32,2335 1752.32,2335 1852.32,2335 1952.32,2335 2052.32,2335 2152.32,2335 2252.32,2335 2352.32,2335 2552.32,2335 2652.32,2335 2752.32,2335 2852.32,2335 202.32,2435 302.32,2435 402.32,2435 702.32,2435 1002.32,2435 1602.32,2435 1702.32,2435 1802.32,2435 1902.32,2435 2002.32,2435 2302.32,2435 2402.32,2435 2802.32,2435 152.32,2535 252.32,2535 952.32,2535 1052.32,2535 1152.32,2535 1252.32,2535 2152.32,2535 2452.32,2535 2552.32,2535 2652.32,2535 2752.32,2535 2852.32,2535 302.32,2635 402.32,2635 502.32,2635 602.32,2635 902.32,2635 1002.32,2635 1202.32,2635 1602.32,2635 1702.32,2635 1802.32,2635 1902.32,2635 2102.32,2635 2202.32,2635 2302.32,2635 2402.32,2635 2502.32,2635 2802.32,2635 252.32,2735 352.32,2735 452.32,2735 552.32,2735 652.32,2735 852.32,2735 952.32,2735 1552.32,2735 1652.32,2735 1752.32,2735 1852.32,2735 2052.32,2735 2152.32,2735 2452.32,2735 2552.32,2735 2652.32,2735 2752.32,2735 2852.32,2735 102.32,2835 202.32,2835 302.32,2835 402.32,2835 502.32,2835 602.32,2835 1302.32,2835 1502.32,2835 1802.32,2835 1902.32,2835 2002.32,2835 2102.32,2835 2202.32,2835 2302.32,2835 2402.32,2835 2502.32,2835 2602.32,2835 2802.32,2835 152.32,2935 252.32,2935 352.32,2935 452.32,2935 552.32,2935 652.32,2935 1452.32,2935 1552.32,2935 1752.32,2935 1852.32,2935 1952.32,2935 2052.32,2935 2452.32,2935 2552.32,2935 2752.32,2935 2852.32,2935 102.32,3035 202.32,3035 302.32,3035 402.32,3035 502.32,3035 602.32,3035 1002.32,3035 1502.32,3035 1602.32,3035 1702.32,3035 2002.32,3035 2102.32,3035 2202.32,3035 2302.32,3035 2402.32,3035 2502.32,3035 2702.32,3035 2802.32,3035 152.32,3135 252.32,3135 352.32,3135 452.32,3135 852.32,3135 952.32,3135 1452.32,3135 1552.32,3135 1652.32,3135 1752.32,3135 1952.32,3135 2052.32,3135 2152.32,3135 2252.32,3135 2352.32,3135 2652.32,3135 2752.32,3135 2852.32,3135 102.32,3235 202.32,3235 302.32,3235 402.32,3235 802.32,3235 1002.32,3235 1502.32,3235 1602.32,3235 1702.32,3235 1802.32,3235 2002.32,3235 2102.32,3235 2202.32,3235 2302.32,3235 2402.32,3235 2702.32,3235 2802.32,3235 152.32,3335 252.32,3335 652.32,3335 752.32,3335 1452.32,3335 1552.32,3335 1652.32,3335 1752.32,3335 1952.32,3335 2052.32,3335 2152.32,3335 2252.32,3335 2352.32,3335 2552.32,3335 2652.32,3335 2752.32,3335 2852.32,3335 102.32,3435 202.32,3435 602.32,3435 1302.32,3435 1702.32,3435 1802.32,3435 2002.32,3435 2102.32,3435 2202.32,3435 2302.32,3435 2402.32,3435 2502.32,3435 2602.32,3435 2702.32,3435 2802.32,3435 152.32,3535 1652.32,3535 2052.32,3535 2152.32,3535 2252.32,3535 2352.32,3535 2552.32,3535 2652.32,3535 2752.32,3535 2852.32,3535 2102.32,3635 2202.32,3635 2302.32,3635 2402.32,3635 2502.32,3635 2602.32,3635 252.32,3735 2352.32,3735 2452.32,3735 2552.32,3735 2652.32,3735
  other v2: 1000.64,2234.44
KEY1: R7.2 S2.1 TP4.1 U1.41 | length 1858.1
  Top Layer w8: U1.41 1103.27,2329.29 1103.27,2222.95 1178.26,2147.95 1928.87,2147.95 2265.83,1811 2457.58,1811 TP4.1
  Top Layer w10: S2.1 TP4.1
  Bottom Layer w10: R7.2 2455.75,1640 2473.58,1657.83 S2.1
KEY2: R8.2 S3.1 TP5.1 U1.42 | length 2162.4
  Top Layer w8: U1.42 1119.02,2329.31 1119.02,2227 1184.06,2161.95 1934.67,2161.95 2271.63,1825 2520,1825 2545,1800 TP5.1
  Top Layer w10: S3.1 TP5.1
  Bottom Layer w10: R8.2 2790,1650 2805,1665 S3.1
KEY3: R11.2 S4.1 TP10.1 U1.43 | length 1664.4
  Top Layer w8: U1.43 1133.74,2232.07 1181.36,2184.45 2432.09,2184.45 S4.1 2475,2144.37 TP10.1
  Bottom Layer w8: R11.2 2450,2080 2473.58,2103.58 S4.1
KEY4: R12.2 S5.1 TP11.1 U1.44 | length 1992.6
  Top Layer w8: U1.44 1150.51,2328.29 1150.51,2235.1 1176.11,2209.5 2389.93,2209.5 2445.43,2265 2775,2265 TP11.1 2805,2149.37 S5.1
  Bottom Layer w8: R12.2 2775,2080 2803.58,2108.58 S5.1
LED1: R5.2 TP6.1 U1.58 | length 978
  Top Layer w8: U1.58 2036.32,2508.44 2105,2439.76 TP6.1 R5.2
LED2: R9.2 TP8.1 U1.59 | length 988
  Top Layer w8: U1.59 2036.26,2524.19 2124.72,2612.66 TP8.1 R9.2
LED3: R6.2 TP7.1 U1.60 | length 1048
  Top Layer w8: U1.60 1928.68,2539.94 TP7.1 R6.2
LED4: R10.2 TP9.1 U1.61 | length 1109.7
  Top Layer w8: U1.61 1779.9,2555.69 TP9.1 R10.2
MCLR: P2.1 R2.1 U1.13 | length 1844.6
  Top Layer w10: P2.1 122.24,1807.24 79.29,1807.24 51.69,1834.84 51.69,2376.37 122.24,2446.92 122.24,2727.24 178.89,2783.89 541.11,2783.89 640,2685 R2.1 U1.13
NetC2_2: C2.2 R1.1 R2.2 S1.2 | length 482.5
  Top Layer w10: S1.2 345.83,2680.34 345.83,2614.17 372.82,2587.18 R1.1 R2.2
  Bottom Layer w10: C2.2 237.19,2660 260.69,2683.5 272.51,2683.5 S1.2
NetC3_1: C3.1 U1.85 | length 117.1
  Top Layer w8: U1.85 C3.1
NetC17_2: C17.2 C18.2 PWR1.1 U3.6 | length 1247.2
  Top Layer w10: PWR1.1 520,950 v2(820,1250) ; v2(965.66,1410) 970.79,1410 1012.6,1451.81 U3.6
  Bottom Layer w10: v2(820,1250) 890,1320 890,1370.47 929.53,1410 v2(965.66,1410) 965.88,1410.22 C18.2 C17.2
NetLED1_1: LED1.1 R3.1
  other v2: 138.56,1065.67
NetLED2_1: LED2.1 R4.1
  other v2: 2757.5,1275.75
NetLED3_1: LED3.1 R5.1 | length 105.4
  Top Layer w8: R5.1 2366.49,2374.76 LED3.1
NetLED4_1: LED4.1 R6.1 | length 100.4
  Top Layer w10: R6.1 2260.16,2721.42 LED4.1
NetLED5_1: LED5.1 R9.1 | length 95.4
  Top Layer w8: R9.1 2358.27,2547.66 LED5.1
NetLED6_1: LED6.1 R10.1 | length 100.4
  Top Layer w8: R10.1 2358.27,2885 LED6.1
NetPWR1_2: PWR1.2 R17.2
  other v2: 72.59,950
NetR15_1: R15.1 U3.9 | length 163.2
  Top Layer w10: R15.1 1093.09,1270.85 1110.32,1288.07 1110.32,1358.2 1090.63,1377.89 U3.9
PGEC1: P2.5 U1.24 | length 756.6
  Top Layer w8: P2.5 531.99,2210 734.93,2412.93 796.1,2412.93 U1.24
PGEC2: U1.26
PGED1: P2.4 U1.25 | length 791.5
  Top Layer w8: P2.4 451.79,2110 740,2398.21 U1.25
PGED2: U1.27
RA14/SCL1: P4.3 R13.2 U1.66 | length 1597
  Top Layer w8: U1.66 1404.43,2634.43 1930,3160 P4.3
  Bottom Layer w8: R13.2 P4.3
RA15/SDA1: P4.4 R14.2 U1.67 | length 1629.7
  Top Layer w8: U1.67 1385,2650.18 1994.82,3260 P4.4
  Bottom Layer w8: R14.2 P4.4
RC12/T_CS: LCD.33 U1.63 | length 1262
  Top Layer w8: U1.63 1412.39,2587.18 1491.13,2665.93 1545.93,2665.93 1910,3030 v2(1910,3050)
  Bottom Layer w8: v2(1910,3050) 1910,3472.26 1923.87,3486.13 LCD.33
RC13/BL_CTL: LCD.23 U1.73 U1.74 | length 850.2
  Top Layer w8: U1.73 1356.67,2744.67 1370,2757.99 1370,3207.23 v2(1335,3242.23) ; v3(1386.71,3320) 1410,3343.29 LCD.23
  Bottom Layer w8: v2(1335,3242.23) 1386.71,3293.94 v3(1386.71,3320)
RC15/T_PEN: LCD.31 U1.64 | length 1198.2
  Top Layer w8: U1.64 1313.9,2603.96 1393.76,2603.96 1811.83,3022.03 v2(1845,3022.03)
  Bottom Layer w8: LCD.31 1845,3465 v2(1845,3022.03)
RE0/RST: LCD.5 U1.93 | length 848.1
  Top Layer w8: LCD.5 510,3370 976.26,2903.74 U1.93
RE1/RD: LCD.4 U1.94 | length 983
  Top Layer w8: LCD.4 450,3560 450,3398.62 454.69,3393.93 959.49,2889.13 959.49,2846.08 U1.94
RE2/WR: LCD.3 U1.98 | length 856.9
  Top Layer w8: LCD.3 410,3379.6 896.5,2893.1 896.5,2846.08 U1.98
RE3/LCD_RS: LCD.2 U1.99 | length 991.8
  Top Layer w8: LCD.2 360,3550 360,3409.8 880.75,2889.05 880.75,2846.08 U1.99
RE4/CD_CS: LCD.1 U1.100 | length 885.3
  Top Layer w8: LCD.1 310,3440 866.02,2883.98 U1.100
RF2/U1RX: P3.2 U1.52 | length 1576.5
  Top Layer w8: U1.52 1390.48,2413.96 1513.43,2291 2447.69,2291 2498.34,2341.66 2531.69,2375 2531.69,2555.69 2551,2575 P3.2
RF4/U3RX: U1.49 U3.26 | length 804.7
  Top Layer w8: v2(1110,1670) 1110,1586.97 U3.26 ; U1.49 1228.23,2285.81 1240,2274.04 v2(1240,2260)
  Bottom Layer w8: v2(1110,1670) 1110,1710 1243.82,1843.82 1243.82,2256.18 v2(1240,2260)
RF5/U3TX: U1.50 U3.25 | length 818.1
  Top Layer w8: U1.50 1243.98,2299.34 v2@1273.32,2270
  Top Layer w10: U3.25 1130,1624.64 1150,1644.64 v2(1150,1670) ; v2@1273.32,2270 v2(1276.07,2270)
  Bottom Layer w10: v2(1150,1670) 1150,1711.13 1276.07,1837.19 v2(1276.07,2270)
RF8/U1TX: P3.1 U1.53 | length 1642.9
  Top Layer w8: U1.53 1394.53,2429.7 1519.23,2305 2441.89,2305 2501,2364.11 2501,2596 2580,2675 P3.1
RG6/SCK2: LCD.34 U1.10 | length 2957.1
  Top Layer w8: U1.10 745.57,2634.43 720,2660 720,2985 260,3445 260,3627.25 320.75,3688 1822,3688 LCD.34
RG7/SDI2: LCD.29 U1.11 | length 3446.5
  Top Layer w8: U1.11 796.1,2619.7 740.5,2619.7 706,2654.2 706,2979.2 246,3439.2 246,3636 312,3702 1921.9,3702 1985,3638.9 1985,3565 1970,3550 1760,3550 LCD.29
RG8/SDO2: LCD.30 U1.12 | length 2945.4
  Top Layer w8: U1.12 796.1,2603.96 736.45,2603.96 692,2648.4 692,2973 232,3433 232,3641.8 310.2,3720 1705,3720 v2(1710,3725)
  Bottom Layer w8: LCD.30 v2(1710,3725)
RG9/SS2: U1.14
pads on no net: LCD.32 P1.5 P2.6 S1.3 S1.4 S2.3 S2.4 S3.3 S3.4 S4.3 S4.4 S5.3 S5.4 U1.1 U1.3 U1.4 U1.5 U1.6 U1.7 U1.8 U1.9 U1.17 U1.18 U1.19 U1.20 U1.21 U1.22 U1.23 U1.28 U1.29 U1.32 U1.33 U1.34 U1.35 U1.38 U1.39 U1.40 U1.51 U1.56 U1.57 U1.87 U1.88 U1.89 U1.90 U1.91 U1.92 U1.95 U1.96 U1.97 U3.0 U3.1 U3.2 U3.10 U3.11 U3.12 U3.13 U3.14 U3.15 U3.16 U3.17 U3.18 U3.19 U3.20 U3.21 U3.22 U3.23 U3.24 U3.27 U3.28

## Polygon pours and split planes (outlines as drawn)
GND on Bottom Layer "GND_L02_P052" (solid, remove dead copper, pour order 52): 5,3830 5,-85 2895,-85 2895,3830
GND on Bottom Layer "GND_L02_P012" (solid, remove dead copper, pour order 12): 10,3825
GND on Top Layer "GND_L01_P050" (solid, remove dead copper, pour order 50): 20,-90 25,-85 2895,-85 2895,3830 5,3830

## Keep-outs
Keep-Out Layer:
  lines w10: 5,-85 5,3830 2895,3830 2895,-85 5,-85

## Other copper
Top Layer:
  region net 3V3: 1592.32,1976 1467.5,1976 1467.5,1941 1250,1941 1250,1876 1467.5,1876 1467.5,1831 1592.32,1831

## Silkscreen, mask and mechanical layers (free items; w line width, h text height)
Top Overlay:
  text "RS" at 255,3726.14 h30
  text "RD" at 353.34,3726.14 h30
  text "D2" at 567.08,3726.14 h30
  text "D4" at 659,3726.14 h30
  text "G" at 1290,3726.14 h30
  text "V" at 1385,3726.14 h30
  text "G" at 1470,3726.14 h30
  text "MO" at 1760,3726.14 h30
  text "SCK" at 1865,3725.74 h30
  text "D0" at 458.36,3724.65 h30
  text "D6" at 749.17,3724.65 h30
  text "D8" at 855.75,3724.65 h30
  text "D10" at 958.47,3724.65 h30
  text "D12" at 1060,3725 h30
  text "D14" at 1160,3725 h30
  text "V" at 1555,3725 h30
  text "SDO" at 1627.32,3725 h30
  text "V" at 1472.07,3676.06 h30
  text "G" at 1557.5,3676.06 h30
  text "SDI" at 1635,3676.06 h30
  text "D3" at 655,3675 h30
  text "D5" at 744.17,3675 h30
  text "D7" at 850.75,3675 h30
  text "D9" at 955,3675 h30
  text "D11" at 1055,3675 h30
  text "D13" at 1157,3675 h30
  text "D15" at 1270,3675 h30
  text "BL" at 1383.5,3675 h30
  text "PEN" at 1750,3674.07 h30
  text "TCS" at 1865,3674.07 h30
  text "CS" at 252.2,3670 h30
  text "WR" at 348.34,3670 h30
  text "RST" at 454.66,3670 h30
  text "D1" at 564.6,3670 h30
  text "SDA" at 2435,3244.25 h30
  text "RA15" at 2693.43,3236.5 h30
  text "SCL" at 2435,3150 h30
  text "RA14" at 2693.43,3140 h30
  text "GND" at 2435,3045 h30
  text "RA 2-5" at 2225,3003.17 h30
  text "3V3" at 2440,2940 h30
  text "TX" at 2483,2670 h30
  text "RX" at 2484.46,2553.68 h30
  text "RF8" at 2695,2455 h30
  text "G" at 2495.34,2451.77 h60
  text "RF8" at 2702.32,2365 h30
Bottom Overlay:
  text "LCD_CS=RE4" at 2235,2923.68 h40
  text "LCD_RS=RE3" at 2235,2868.68 h40
  text "WR/CLK=RE2" at 2235,2808.68 h40
  text "RST=RE0" at 2235,2758.68 h40
  text "DB 0-15=RD 0-15" at 2235,2708.68 h40
  text "BL_CTL=RC14" at 2235,2658.68 h40
  text "MOSI=RG8" at 2230,2598.68 h40
  text "MISO=RG7" at 2230,2553.68 h40
  text "T_PEN=RC15" at 2235,2503.68 h40
  text "T_CS=RC12" at 2235,2448.68 h40
  text "T_CLK=RG6" at 2230,2383.68 h40
  text "NC" at 290,2300 h60 r135
  text "PGEC" at 295,2155 h60 r315
  text "PGED" at 290,2055 h60 r315
  text "HandWriting_v1.1" at 1575,2035 h100
  text "RB15" at 2780,2000 h30
  text "RB14" at 2455,1995 h30
  text "GND" at 309.52,1985 h60 r135
  text "2020.7.14" at 1440,1940 h100
  text "5V" at 255,1875 h60 r315
  text "SEED CLASS 2017" at 1608.49,1860.3 h100
  text "ZZK WYW PZQ" at 1541.7,1770 h100
  text "MCLR" at 290,1748.77 h60 r315
  text "RB13" at 2784.59,1570.59 h30
  text "RB12" at 2452.07,1560 h30
Drill Drawing:
  lines w10: 5,3830 5,-85 2895,-85 2895,3695 2895,3830 5,3830 ; 5,3830 5,3830

## Text inside footprints (layer, text, board x,y; h text height)
LCD: Top Overlay "1" at 210,3450 h50; Top Overlay "2" at 210,3600 h50; Top Overlay "33" at 1960,3450 h50; Top Overlay "34" at 1960,3600 h50
P2: Top Overlay "1" at 175,1710 h50 r90
P3: Top Overlay "1" at 2615,2775 h60 r270
P4: Top Overlay "1" at 2610,2860 h30 r90